# Altium PCB STM32F407_board.PcbDoc (part 3 of 3)
Units mm, origin at the board's own origin, x right, y up, seen from the top; angles counter-clockwise.
Board outline 72.6 x 74.6 mm, 4 copper layers (Top Layer, GND, PWR, Bottom Layer), stack 1.564 mm thick; 188 components, 143 nets, 738 pads, 406 vias.
Unrouted connection lines stored in the file: 4.
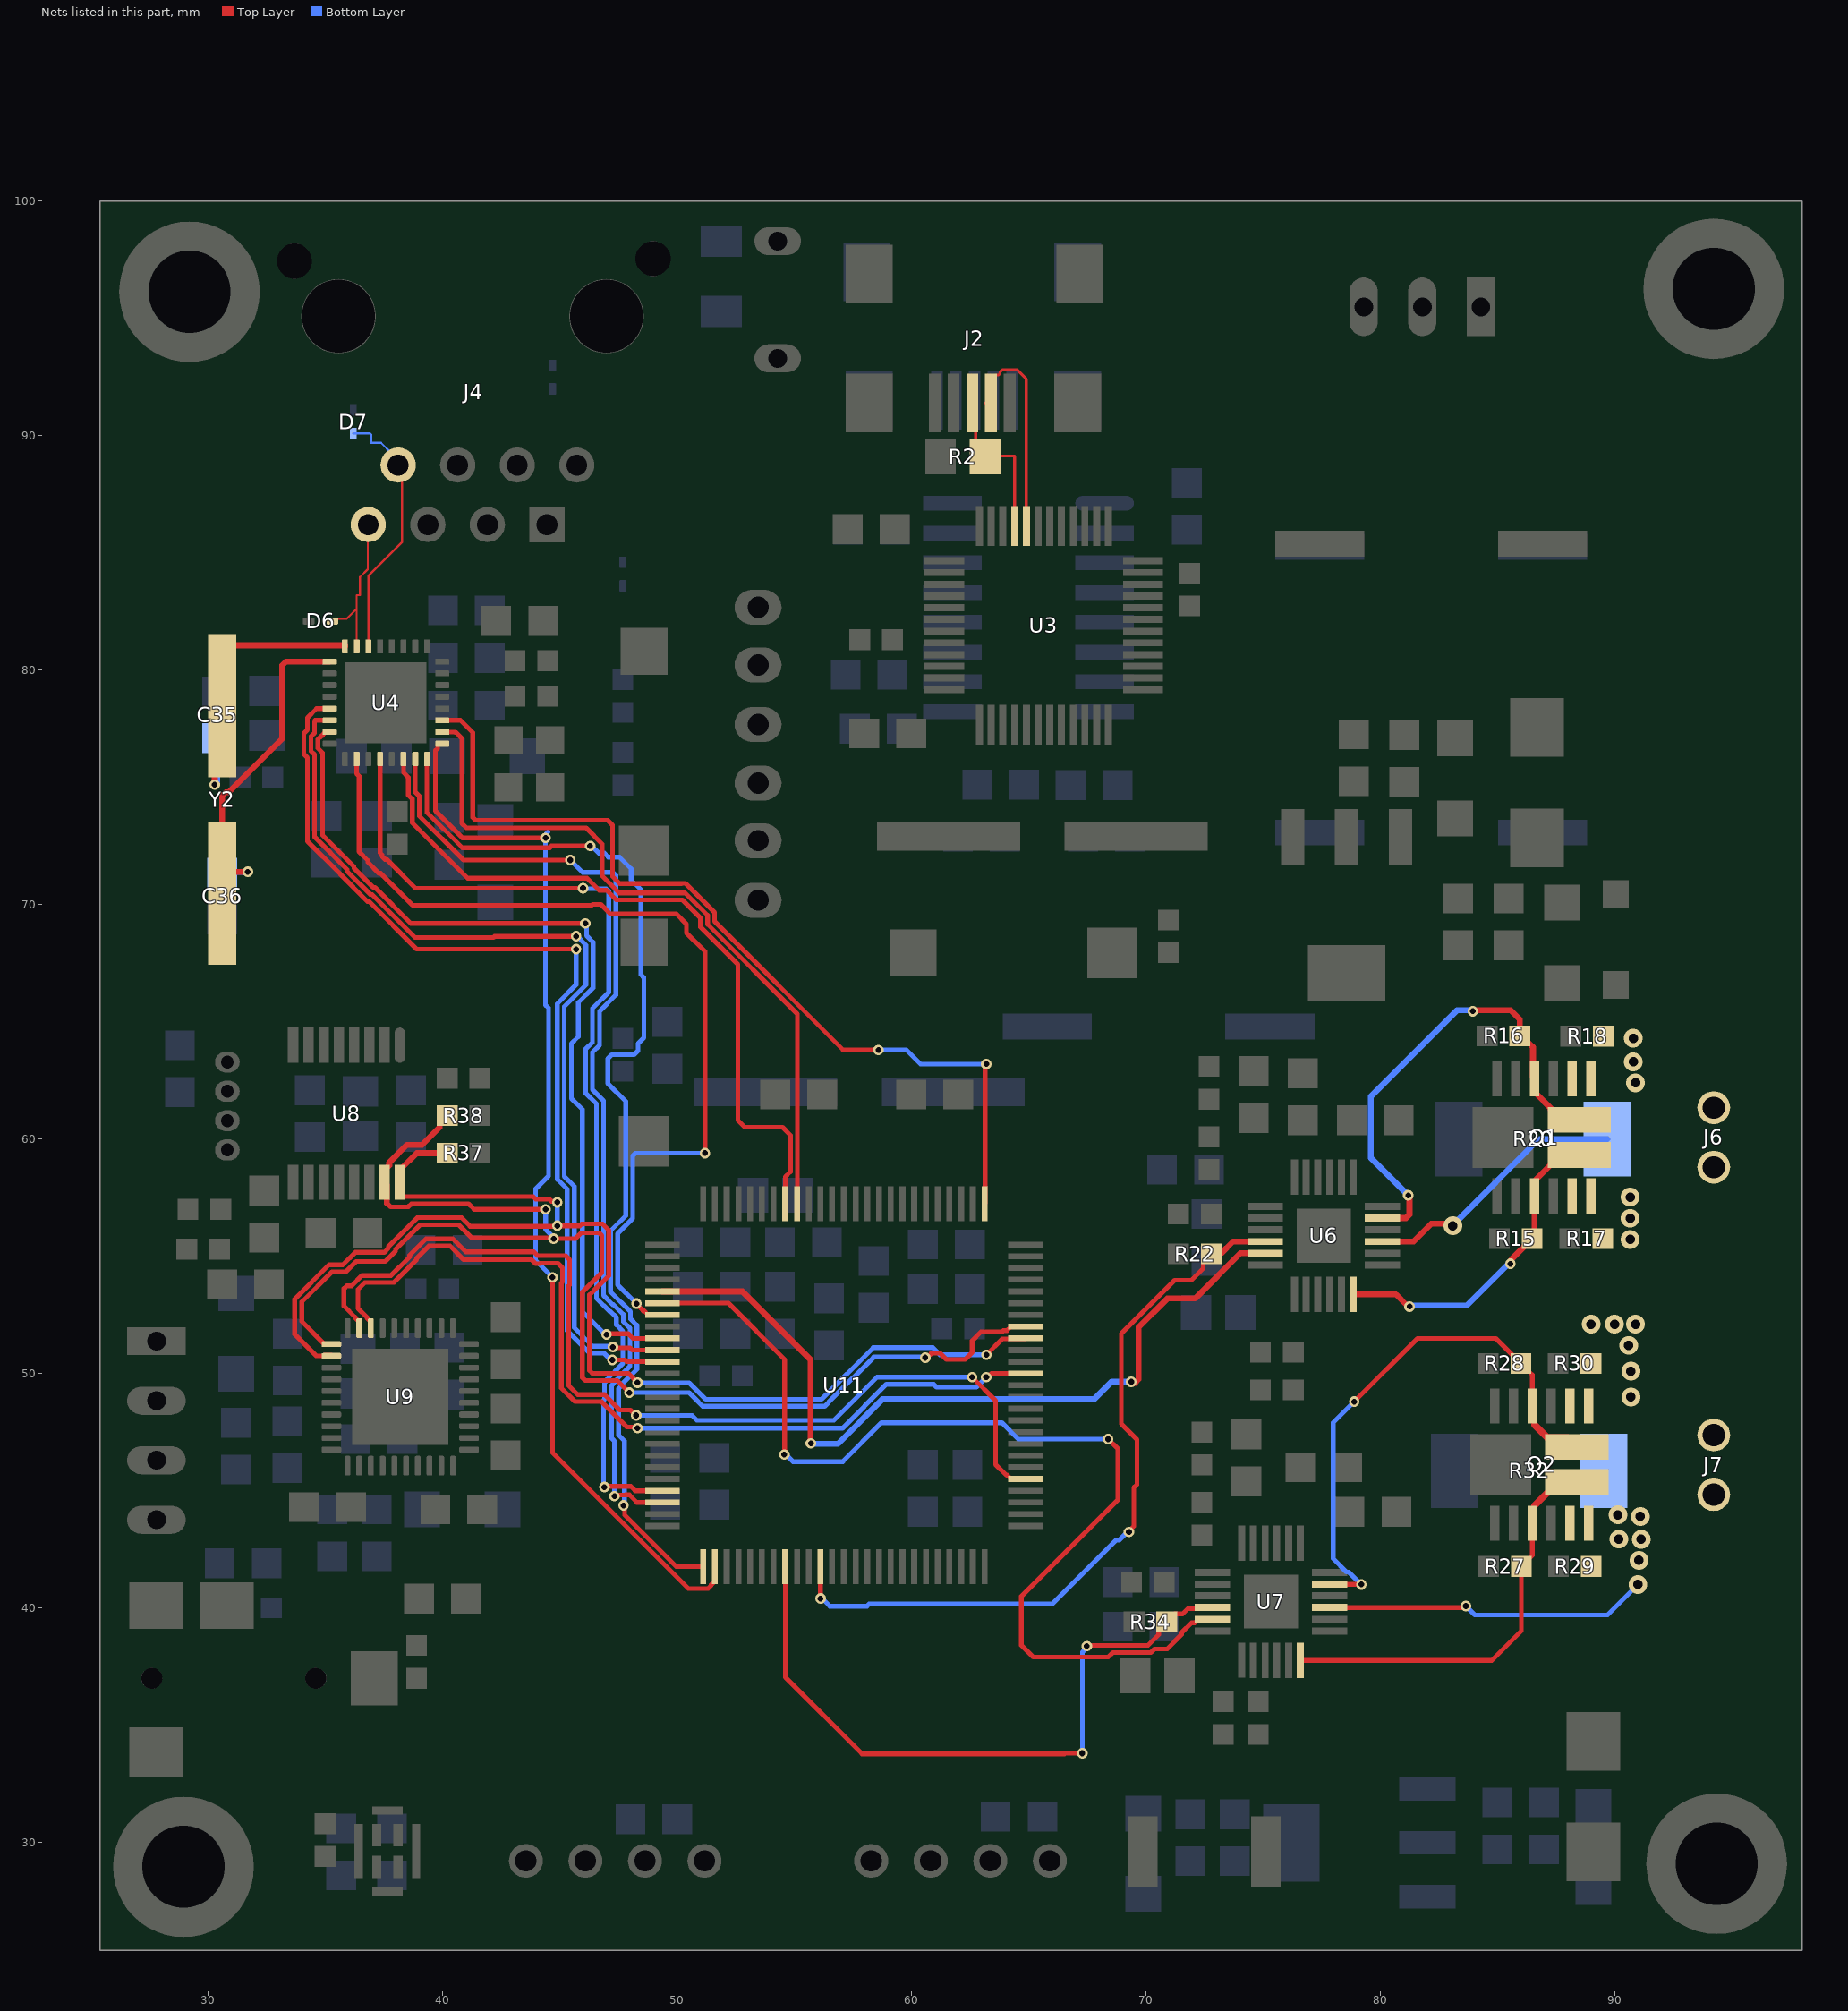
[diagram p5: the nets of this part, all layers, seen from the top]

## Via types
v1: diameter 0.8, hole 0.4, Top Layer to Bottom Layer, 257 vias
v2: diameter 0.45, hole 0.25, Top Layer to Bottom Layer, 149 vias

## Nets (pads, with @x,y where several pads share a name; then routed paths per layer and width w, separated by ;. In a path a pad name is that pad's centre, name@x,y a point inside that pad or via, vN(x,y) a via of type N, cw(c..) or ccw(c..) an arc to the next point about the centre after c; other vN are vias at no path point) (continued)
RX_D1: U4.15 U11.34 | length 38.8
  Top Layer w0.2: U4.15@35.192,77.363 35.167,77.338 34.992,77.338 34.848,77.194 34.833,77.194 34.692,77.053 34.692,76.673 34.892,76.473 34.892,72.962 36.23,71.623 36.23,71.553 37.05,70.733 37.121,70.733 38.654,69.2 v2(46.1,69.2) ; v2(47.003,51.662) 47.04,51.7 47.925,51.7 48.125,51.5 U11.34@49.389,51.5
  Bottom Layer w0.2: v2(46.1,69.2) 46.148,69.152 46.148,68.677 46.425,68.4 46.425,66.447 45.802,65.823 45.802,64.373 45.502,64.073 45.502,61.731 45.975,61.257 45.975,52.633 46.946,51.662 v2(47.003,51.662)
RX_D2: U4.14 U11.35 | length 40.3
  Top Layer w0.2: 34.542,77.8 34.542,77.327 34.392,77.177 34.392,76.549 34.542,76.399 34.542,72.887 35.93,71.499 35.93,71.429 36.926,70.433 36.997,70.433 38.829,68.6 42.182,68.6 42.232,68.65 v2(45.7,68.65) ; 34.563,77.863 U4.14@35.192,77.863 ; v2(47.275,51.128) 47.314,51.089 48.007,51.089 48.096,51 U11.35@49.389,51
  Bottom Layer w0.2: v2(45.7,68.65) 45.751,68.65 46.125,68.276 46.125,66.571 45.202,65.648 45.202,58.409 45.625,57.985 45.625,51.949 46.411,51.163 47.241,51.163 v2(47.275,51.128)
RX_D3: U4.13 U11.36 | length 41.3
  Top Layer w0.2: U4.13@35.192,78.363 34.634,78.363 34.242,77.971 34.242,77.451 34.092,77.301 34.092,76.425 34.242,76.275 34.242,72.707 35.63,71.318 35.63,71.304 36.802,70.133 36.872,70.133 38.905,68.1 v2(45.7,68.1) ; v2(47.246,50.579) 47.792,50.579 47.871,50.5 U11.36@49.389,50.5
  Bottom Layer w0.2: v2(45.7,68.1) 45.7,66.57 44.902,65.772 44.902,58.285 45.325,57.861 45.325,51.825 46.287,50.863 46.895,50.863 47.178,50.579 v2(47.246,50.579)
RX_DV: U4.18 U11.32 | length 40.8
  Top Layer w0.2: U4.18@36.342,76.213 36.342,75.591 36.442,75.491 36.442,72.26 36.83,71.872 36.83,71.801 37.299,71.333 37.369,71.333 38.727,69.975 46.374,69.975 46.408,70.01 46.761,70.01 47.17,69.6 49.983,69.6 50.413,69.17 50.413,68.79 51.2,68.003 v2(51.2,59.4) ; v2(48.281,52.981) 48.281,52.96 48.569,52.673 48.605,52.673 48.778,52.5 U11.32@49.389,52.5
  Bottom Layer w0.2: v2(48.281,52.981) 47.475,53.788 47.475,55.962 48.12,56.607 48.12,59.283 48.238,59.4 v2(51.2,59.4)
RX_ER: U4.20 U11.47 | length 43.9
  Top Layer w0.2: U4.20@37.342,76.213 37.342,72.209 37.43,72.121 37.43,72.05 37.547,71.933 37.618,71.933 38.851,70.7 v2(46,70.7) ; v2(46.913,45.157) 46.944,45.188 48.037,45.188 48.225,45 U11.47@49.389,45
  Bottom Layer w0.2: v2(46,70.7) 46.025,70.675 46.983,70.675 47.1,70.558 47.1,66.273 46.402,65.575 46.402,64.124 46.102,63.824 46.102,61.979 46.575,61.506 46.575,53.201 47.138,52.637 47.176,52.637 47.425,52.388 47.425,52.08 47.7,51.805 47.7,50.432 47,49.732 47,49.694 46.915,49.608 46.915,48.895 46.875,48.855 46.875,45.195 v2(46.913,45.157)
SCL: R37.1 U8.16 U9.2 U11.92 | length 56.8
  Top Layer w0.2: U9.2@34.974,50.75 34.617,50.75 33.7,51.667 33.7,53.173 35.164,54.636 35.752,54.636 36.281,55.165 37.518,55.165 37.7,55.347 37.7,55.414 38.93,56.644 39.076,56.644 40.817,56.644 41.183,56.278 44.878,56.278 v2(44.9,56.3) 45.86,56.3 45.937,56.378 46.83,56.378 47.1,56.107 47.1,54.177 46.575,53.652 46.275,53.352 46.275,50.13 46.405,50 47.935,50 v2(48.326,49.609) ; U8.16@38.186,58.155 38.186,57.669 38.311,57.544 43.872,57.544 43.988,57.428 44.577,57.428 44.658,57.348 44.852,57.348 v2(44.9,57.3) ; v2(63.209,50.8) 63.882,51.473 64.838,51.473 U11.92@64.865,51.5
  Top Layer w0.254: U9.2@34.974,50.75 U9.2@35.265,50.75 ; U8.16@38.186,58.155 38.186,58.68 38.906,59.4 R37.1@40.202,59.4 R37.1@40.402,59.4
  Bottom Layer w0.2: v2(44.9,56.3) v2(44.9,57.3) ; v2(48.326,49.609) 50.521,49.609 51.23,48.9 56.177,48.9 58.377,51.1 60.926,51.1 61.226,50.8 v2(63.209,50.8)
SCLK: U9.38 U11.89 | length 38.6
  Top Layer w0.2: U9.38@36.95,51.935 36.95,52.23 36.925,52.255 36.892,52.255 36.775,52.372 36.775,52.403 36.4,52.778 36.4,53.587 36.693,53.88 37.93,53.88 38.9,54.85 38.9,54.917 39.427,55.444 39.573,55.444 ; 39.574,55.445 40.32,55.445 40.906,54.858 43.805,54.858 43.98,54.683 44.146,54.683 44.163,54.7 44.934,54.7 45.125,54.509 45.125,53.899 45.075,53.849 45.075,49.376 45.651,48.8 46.788,48.8 47.875,47.713 48.276,47.713 v2(48.324,47.665) ; v2(63.198,49.841) 63.265,49.841 63.424,50 U11.89@64.865,50
  Bottom Layer w0.2: v2(48.324,47.665) 57.065,47.665 58.942,49.542 60.952,49.542 61.077,49.417 62.774,49.417 v2(63.198,49.841)
SDA: R38.1 U8.15 U9.1 U11.93 | length 58.5
  Top Layer w0.2: U9.1@35.265,51.25 34.97,51.25 34,52.22 34,53.049 35.288,54.336 35.876,54.336 36.32,54.78 37.557,54.78 38,55.223 38,55.29 39.054,56.344 39.201,56.344 ; 37.634,57.258 37.787,57.105 38.542,57.105 38.682,57.244 41.11,57.244 41.352,57.003 v2(44.401,57.003) ; 39.201,56.344 40.692,56.344 41.249,55.788 44.704,55.788 v2(44.744,55.748) 45.672,55.748 45.923,56 46.683,56 46.8,55.883 46.8,54.302 45.975,53.477 45.975,49.817 46.092,49.7 47.457,49.7 v2(47.973,49.184) ; v2(60.6,50.675) 60.668,50.675 60.864,50.871 61.225,50.871 61.496,50.6 62.3,50.6 62.6,50.9 62.6,51.4 62.973,51.773 63.874,51.773 63.928,51.827 64.081,51.827 64.254,52 U11.93@64.865,52
  Top Layer w0.254: 37.634,57.258 37.634,58.057 U8.15@37.536,58.155 37.536,58.68 37.734,58.878 37.734,58.999 38.489,59.754 39.135,59.754 39.884,60.503 39.884,60.682 R38.1@40.202,61
  Bottom Layer w0.2: v2(44.401,57.003) 44.401,56.148 44.744,55.805 v2(44.744,55.748) ; v2(47.973,49.184) 50.522,49.184 50.75,48.956 51.105,48.6 56.301,48.6 56.657,48.956 58.401,50.7 60.575,50.7 v2(60.6,50.675)
SDIN: U9.39 U11.80 | length 42.5
  Top Layer w0.2: U9.39@36.45,51.935 36.45,52.23 36.425,52.255 36.392,52.255 36.275,52.372 36.275,52.403 35.8,52.878 35.8,53.619 35.917,53.736 36.125,53.736 36.569,54.18 37.806,54.18 38.6,54.974 38.6,55.041 39.303,55.744 39.449,55.744 ; 39.45,55.745 40.444,55.745 41,55.188 43.899,55.188 44.064,55.023 45.258,55.023 45.425,54.856 45.425,53.775 45.375,53.725 45.375,49.501 45.776,49.1 46.912,49.1 47.569,48.443 48.026,48.443 48.257,48.212 v2(48.268,48.212) ; v2(62.595,49.842) 63.6,48.837 63.6,46.118 64.045,45.673 64.081,45.673 64.254,45.5 U11.80@64.865,45.5
  Bottom Layer w0.2: v2(48.268,48.212) 50.645,48.212 50.857,48 56.7,48 58.542,49.842 v2(62.595,49.842)
SH1: J6.1 Q1.3 Q1.13 R15.1 U6.18 | length 14
  Top Layer w0.254: U6.18@78.847,53.376 80.676,53.376 81.152,52.9 v2@81.3,52.9 ; v2@85.602,54.728 85.602,54.868 86.595,55.861 Q1.3@86.595,57.571 86.668,57.644 86.668,58.294 87.695,59.321 Q1.13@88.495,59.321
  Bottom Layer w0.254: v2@81.3,52.9 83.7,52.9 85.528,54.728 v2@85.602,54.728
  other v2: 81.258,52.853 85.56,54.681
SH1_2: J7.1 Q2.3 Q2.13 R27.1 U7.18 | length 17.7
  Top Layer w0.2: U7.18@76.598,37.763 84.763,37.763 86.023,39.023 R27.1@86.023,41.771 86.492,42.24 Q2.3@86.492,43.613 86.592,43.713 Q2.3@86.592,44.363 ; Q2.13@87.592,45.363 Q2.13@88.392,45.363
  Top Layer w0.3: Q2.3@86.592,44.363 Q2.13@87.592,45.363
SH2: J6.2 Q1.10 Q1.14 R16.1 U6.23 | length 20.8
  Top Layer w0.254: U6.23@80.097,56.63 81.107,56.63 81.256,56.779 81.256,57.491 81.2,57.547 v2(81.2,57.6) ; v2@84,65.5 85.561,65.5 85.962,65.099 R16.1@85.962,64.4 ; R16.1@86.064,64.378 86.064,64.298 86.28,64.083 86.359,64.083 86.522,63.92 86.522,62.644 Q1.10@86.595,62.571 86.668,62.498 86.668,61.932 87.272,61.328 87.272,61.244 87.695,60.821 Q1.14@88.495,60.821
  Bottom Layer w0.254: v2(81.2,57.6) 79.6,59.2 79.6,61.8 83.3,65.5 v2@84,65.5
  other v2: 83.958,65.453
SH2_2: J7.2 Q2.10 Q2.14 R28.1 U7.23 | length 23.8
  Top Layer w0.2: U7.23@77.848,41.017 77.856,41.009 79.191,41.009 v2(79.2,41) ; v2(78.9,48.8) 81.6,51.5 84.933,51.5 R28.1@86.006,50.427 86.492,49.941 Q2.10@86.492,48.613 86.592,48.513 86.592,47.808
  Top Layer w0.3: 86.592,47.808 87.137,47.263 87.992,47.263 Q2.14@88.392,46.863
  Bottom Layer w0.2: v2(78.9,48.8) 78,47.9 78,42.099 78.563,41.536 78.664,41.536 v2(79.2,41)
SNSOUT: R22.1 U6.10 U11.61 | length 32.3
  Top Layer w0.2: U11.61@56.127,41.762 56.13,41.759 56.13,40.407 v2(56.133,40.404) ; v2(69.286,43.243) 69.286,43.272 69.5,43.485 69.5,45.138 69.627,45.265 69.627,47.182 68.961,47.847 68.961,51.699 71.235,53.973 71.947,53.973 72.454,54.48 72.454,54.755 R22.1@72.798,55.1
  Top Layer w0.254: R22.1@73.215,55.118 73.727,55.63 U6.10@75.097,55.63
  Bottom Layer w0.2: v2(56.133,40.404) 56.201,40.404 56.529,40.075 58.113,40.075 58.211,40.173 66.024,40.173 68.751,42.9 68.887,42.9 69.23,43.243 v2(69.286,43.243)
SNSOUT_2: R34.1 U7.10 U11.58 | length 29.6
  Top Layer w0.2: U11.58@54.627,41.762 54.627,37.049 57.901,33.775 66.542,33.775 66.567,33.8 v2(67.3,33.8) ; v2(67.491,38.371) 67.519,38.4 70.097,38.4 70.554,38.856 70.554,39.055 R34.1@70.898,39.4 71.243,39.745 71.575,39.745 71.798,39.967 72.798,39.967 U7.10@72.848,40.017
  Bottom Layer w0.2: v2(67.3,33.8) 67.3,38.113 67.491,38.304 v2(67.491,38.371)
SO: U6.11 U11.30 | length 35.2
  Top Layer w0.254: U11.30@49.389,53.5 52.8,53.5 55.7,50.6 55.7,47.039 v2(55.72,47.02) ; v2@69.4,49.6 69.551,49.6 69.7,49.749 69.7,51.975 70.925,53.2 72.108,53.2 74.038,55.13 U6.11@75.097,55.13
  Bottom Layer w0.254: v2(55.72,47.02) 55.739,47 56.874,47 58.774,48.9 67.8,48.9 68.543,49.643 v2(69.386,49.643)
SO_2: U7.11 U11.31 | length 44.9
  Top Layer w0.2: U11.31@49.389,53 52.2,53 54.6,50.6 54.6,46.557 v2(54.586,46.543) ; v2(68.4,47.2) 68.805,46.795 68.805,44.606 64.7,40.501 64.7,38.4 65.2,37.9 68.4,37.9 68.6,38.1 70.222,38.1 70.372,38.25 70.92,38.25 71.543,38.873 71.543,38.95 71.96,39.367 72.098,39.367 72.248,39.517 U7.11@72.848,39.517
  Bottom Layer w0.2: v2@54.6,46.5 54.697,46.5 54.957,46.241 57.078,46.241 58.738,47.9 63.862,47.9 64.562,47.2 v2(68.4,47.2)
SP: Q1.5 Q1.6 Q1.7 Q1.8 R17.1 R18.1 R20.2 U6.21 | length 11.5
  Top Layer w0.254: U6.21@80.097,55.63 81.431,55.63 82.192,56.391 83.009,56.391 v1(83.1,56.3)
  Bottom Layer w0.254: v1(83.1,56.3) 83.1,56.325 86.775,60 R20.2@89.7,60
  other v1: 90.674,55.72 90.674,56.62 90.674,57.52 90.9,62.4 90.8,63.3 90.8,64.3
SP_2: Q2.5 Q2.6 Q2.7 Q2.8 R29.1 R30.1 R32.2 U7.21 | length 13.9
  Top Layer w0.2: U7.21@77.848,40.017 v2@83.683,40.017
  Bottom Layer w0.2: v2(83.66,40.08) 84.04,39.7 89.7,39.7 v1(91,41)
  other v1: 91.039,42.029 90.181,42.934 91.139,42.929 91.1,43.9 90.142,43.967 90.7,49 90.7,50.1 90.6,51.2 89,52.1 90,52.1 90.9,52.1
TD_N: D7.K J4.2 U4.6 | length 10.6
  Top Layer w0.092: U4.6@36.842,81.013 36.842,84.024 38.275,85.457 38.275,88.381 J4.2@38.157,88.499
  Bottom Layer w0.092: D7.K@36.2,90.095 36.911,90.095 36.957,90.049 36.957,89.7 37.38,89.7 37.83,89.25 J4.2@38.11,89.25
TD_P: D6.K J4.1 U4.7 | length 6.8
  Top Layer w0.092: D6.K@35.3,82 35.5,82.2 35.922,82.2 36.342,82.62 ; U4.7@36.342,81.013 36.342,82.62 ; J4.1@36.817,86.21 36.817,84.309 36.482,83.974 36.482,83.2 36.342,83.2 36.342,82.62
TX_CLK: U4.22 U11.18 | length 31.7
  Top Layer w0.2: U4.22@38.342,76.213 38.342,75.634 38.542,75.434 38.542,74.679 38.719,74.502 38.719,73.481 41.075,71.125 46.176,71.125 46.692,70.61 47.009,70.61 47.419,70.2 50.231,70.2 51.013,69.418 51.013,69.038 52.6,67.451 52.6,60.8 52.9,60.5 54.51,60.5 54.847,60.163 54.847,58.605 54.627,58.385 U11.18@54.627,57.238
TX_D0: U4.24 U11.51 | length 46.8
  Top Layer w0.2: U4.24@39.342,76.213 39.342,73.934 40.853,72.423 44.574,72.423 44.65,72.499 v2(46.299,72.499) ; v2(47.727,44.374) 47.775,44.326 47.775,43.967 49.98,41.762 U11.51@51.127,41.762
  Bottom Layer w0.2: v2(46.299,72.499) 46.367,72.499 46.667,72.2 46.907,72.2 47.08,72.027 47.554,72.027 48.054,71.527 48.054,71.053 48.473,70.634 48.473,67.013 48.6,66.886 48.6,64.326 48.345,64.071 48.345,63.771 48.173,63.6 47.227,63.6 47.056,63.429 47.056,62.374 47.82,61.609 47.82,56.732 47.175,56.086 47.175,53.487 48.025,52.637 48.025,52.329 48.3,52.054 48.3,50.183 47.701,49.584 47.701,49.546 47.515,49.36 47.515,47.367 47.763,47.119 47.763,44.41 v2(47.727,44.374)
TX_D1: U4.25 U11.52 | length 45.5
  Top Layer w0.1: U4.25@39.992,76.863 U4.25@40.035,76.82
  Top Layer w0.2: U4.25@39.992,76.863 39.817,76.863 39.792,76.838 39.792,76.663 39.7,76.571 39.7,74 40.852,72.848 v2(44.398,72.848) ; v2(44.7,54.1) 44.7,46.617 50.493,40.824 51.337,40.824 51.459,40.946 51.459,40.983 51.627,41.151 U11.52@51.627,41.762
  Bottom Layer w0.2: 44.5,73.1 44.446,73.046 44.446,72.896 v2(44.398,72.848) 44.398,65.718 44.525,65.591 44.525,58.425 43.976,57.876 43.976,54.824 v2(44.7,54.1)
TX_D2: U4.26 U11.17 | length 31.1
  Top Layer w0.2: U4.26@39.992,77.363 40.517,77.363 40.542,77.338 40.589,77.338 40.83,77.097 40.83,73.47 41.027,73.273 46.127,73.273 46.823,72.577 46.823,71.22 47.543,70.5 50.356,70.5 51.313,69.543 51.313,69.163 55.147,65.329 55.147,57.578 U11.17@55.1,57.531
TX_D3: U4.27 U11.1 | length 39
  Top Layer w0.2: U4.27@39.992,77.863 40.764,77.863 41.299,77.328 41.299,73.717 41.416,73.6 47.055,73.6 47.262,73.393 47.262,71.205 47.567,70.9 50.2,70.9 50.207,70.907 50.373,70.907 51.613,69.667 51.613,69.287 57.1,63.8 v2(58.6,63.8) ; U11.1@63.127,57.238 63.154,57.265 63.154,63.154 v2(63.2,63.2) v2@63.152,63.248
  Bottom Layer w0.2: v2(58.6,63.8) 59.8,63.8 60.4,63.2 v2(63.2,63.2)
TX_EN: U4.23 U11.48 | length 42.1
  Top Layer w0.2: U4.23@38.842,76.213 38.842,74.803 39.019,74.626 39.019,73.781 40.9,71.9 v2(45.455,71.9) ; v2(47.338,44.763) 47.386,44.811 47.796,44.811 47.81,44.825 47.976,44.825 48.301,44.5 U11.48@49.389,44.5
  Bottom Layer w0.2: v2(45.455,71.9) 45.982,71.373 47.283,71.373 47.4,71.256 47.4,66.149 46.702,65.451 46.702,64 46.402,63.7 46.402,62.103 46.875,61.63 46.875,53.325 47.263,52.937 47.3,52.937 47.725,52.513 47.725,52.204 48,51.929 48,50.308 47.401,49.709 47.401,49.67 47.215,49.484 47.215,47.243 47.338,47.12 v2(47.338,44.763)
USB_D_N: J2.2 U3.32 | length 11.8
  Top Layer w0.125: J2.2@63.165,91.396 63.179,91.396 J2.2@63.366,91.583 ; J2.2@63.366,92.583 63.366,92.183 J2.2@63.366,91.583 ; U3.32@64.909,86.153 64.909,92.421 64.517,92.813 63.883,92.813 63.787,92.717 63.787,92.661 63.714,92.587 63.587,92.587 63.357,92.357 63.357,90.819 63.357,91.574 J2.2@63.366,91.583
USB_D_P: J2.3 R2.1 U3.33 | length 7.9
  Top Layer w0.125: J2.3@62.566,92.583 62.566,91.183 62.753,90.996 62.753,89.647 63.261,89.139 64.409,89.139 U3.33@64.409,86.153
XTAL_IN_25MHZ: C36.2 U4.9 Y2.2 | length 15.3
  Top Layer w0.254: Y2.2@30.607,70.486 Y2.2@30.607,70.927 ; v2(31.7,71.4) 31.08,71.4 Y2.2@30.607,70.927 ; U4.9@35.192,80.363 33.321,80.363 33.165,80.207 33.165,77.075 30.884,74.794 30.756,74.794 30.607,74.645 Y2.2@30.607,70.927
  Bottom Layer w0.254: C36.2@30.607,71.358 30.649,71.4 v2(31.7,71.4)
XTAL_OUT_25MHZ: C35.2 U4.8 Y2.1 | length 13.1
  Top Layer w0.254: v2(30.287,75.113) 30.287,78.166 Y2.1@30.607,78.486 30.607,80.588 31.08,81.061 35.84,81.061 35.842,81.059 U4.8@35.842,81.013
  Bottom Layer w0.254: v2(30.287,75.113) 30.287,75.166 30.4,75.279 C35.2@30.4,77.1
pads on no net: J2.1 J2.4 J4. J4.3 J4.4 J4.7 J4.8 J5.1 J5.4 J9. J9.4 J12. MH3.1 MH4.1 U3.2 U3.3 U3.4 U3.10 U3.11 U3.12 U3.13 U3.14 U3.15 U3.16 U3.17 U3.19 U3.21 U3.22 U3.28 U3.29 U3.30 U3.31 U3.41 U3.42 U3.43 U3.45 U3.46 U4.30 U4.31 U5.7 U5.8 U5.9 U5.10 U5.11 U5.12 U5.13 U5.15 U8.6 U8.7 U8.8 U8.9 U9.20 U9.21 U9.22 U9.23 U9.24 U9.25 U9.26 U9.29 U9.30 U9.35 U9.36 U11.2 U11.3 U11.4 U11.5 U11.7 U11.8 U11.9 U11.15 U11.38 U11.39 U11.40 U11.41 U11.42 U11.43 U11.44 U11.46 U11.67 U11.77 U11.81 U11.82 U11.83 U11.84 U11.85 U11.86 U11.87 U11.88 U11.91 U11.95 U11.96 U11.97 U11.98

## Polygon pours and split planes (outlines as drawn)
+1V8 on Bottom Layer "+1V8_L04_P069" (solid, remove dead copper, pour order 69): 35.435,52.4 35.435,50.37 41.164,50.37 41.164,52.1 38.603,52.1 38.5,52.1 38.444,53.096 38.281,53.4 37.223,53.4 37.223,52.868 36.756,52.4
NetC25_2 on Bottom Layer "NETC25_2_L04_P122" (solid, remove dead copper, pour order 122): 51,96 51,94.5 51.1,94.6 53.6,94.6 53.6,95.8 53.4,96
EARTH_GND on Bottom Layer "EARTH_GND_L04_P119" (solid, remove dead copper, pour order 119): 25.751,92.3 33.1,92.3 33.1,96.8 56,96.8 56.9,95.9 74.5,95.9 76,97.4 87.8,97.4 90.3,94.9 90.3,92.7 90.5,92.5 97.5,92.5 97.5,99.4 97.4,99.5 26.1,99.5 25.849,99.249
NetC27_2 on Bottom Layer "NETC27_2_L04_P006" (solid, pour order 6): 40.9,83.824 39.157,83.824 39.157,82.102 40.9,82.102
+3V3 on Bottom Layer "+3V3_L04_P008" (solid, remove dead copper, pour order 8): 42.982,74.411 42.971,74.4 38.309,74.4 38.059,74.651 37.211,74.651 37.211,74.85 36.747,75.314 36.747,77.023 35.547,77.023 35.512,77.058 35.255,76.801 35.255,75.663 35.192,75.6 35.192,74.974 31.4,74.4 31.4,72.474 33.625,72.474 34.042,72.891 41.241,72.891 41.241,72.735 41.621,72.735 43.059,72.661
GND on Bottom Layer "GND_L04_P009" (solid, remove dead copper, pour order 9): 41.306,84.2 41.306,76.694 42.694,75.306 44.64,75.306 44.64,77.46 44.1,78 44.1,84.2
GND on Bottom Layer "GND_L04_P010" (solid, remove dead copper, pour order 10): 43.177,72.325 41.902,72.498 34.165,72.498 32.367,71.107 31.471,70.095 31.471,68.494 43.177,68.494 43.283,68.6 43.273,68.61
NetC77_1 on Bottom Layer "NETC77_1_L04_P104" (solid, remove dead copper, pour order 104): 55.5,61.1 57.4,61.1 57.4,62.8 55.5,62.8
NetC76_1 on Bottom Layer "NETC76_1_L04_P105" (solid, remove dead copper, pour order 105): 58.4,61.05 60.6,61.05 60.6,62.75 58.4,62.75
NetC86_2 on Bottom Layer "NETC86_2_L04_P099" (solid, remove dead copper, pour order 99): 52.4,58.4 53.4,58.4 53.4,56.4 55.3,56.4 55.3,52.9 51.7,52.9 51.6,53 51.6,56.3 51.7,56.4 52.4,56.4
GND on Bottom Layer "GND_L04_P058" (solid, remove dead copper, pour order 58): 33.471,63.1 35.352,63.1 35.539,62.913 35.539,61.439 33.574,61.439 33.471,61.543
GND on Bottom Layer "GND_L04_P054" (solid, remove dead copper, pour order 54): 80.2,61.706 83.556,61.706 83.556,58.46 83.551,58.464 80.836,58.464 80.2,59.1
GND on Bottom Layer "GND_L04_P115" (solid, remove dead copper, pour order 115): 49.8,51 49.9,50.9 52,50.9 52.2,50.7 52.2,49.2 53.4,49.2 53.6,49.4 53.6,50.9 55.4,50.9 55.4,50.7 55.7,50.4 57.3,50.4 57.4,50.5 57.4,52 59.2,52 59.4,51.8 60.2,51.8 60.7,51.3 61.9,51.3 61.9,52.5 61.8,52.5 61.6,52.7 61.6,54.2 61.8,54.4 63,54.4 63.2,54.6 63.4,54.6 63.4,56 63.1,56.3 61.8,56.3 61.5,56.3 61.5,54.9 61.1,54.5 59.5,54.5 59.5,54.1 59.1,53.7 57.7,53.7 57.5,53.5 57.5,52.5 57.3,52.3 55.6,52.3 55.3,52.6 49.8,52.6
GND on Bottom Layer "GND_L04_P113" (solid, remove dead copper, pour order 113): 48.8,47.4 48.8,45.7 52.7,45.7 53.1,46.1 53.1,47.4
GND on Bottom Layer "GND_L04_P112" (solid, remove dead copper, pour order 112): 63.1,45.4 58.8,45.4 58.808,45.408 58.808,47.07 63.07,47.07 63.1,47.1
+1V8 on Bottom Layer "+1V8_L04_P094" (solid, remove dead copper, pour order 94): 83.2,30.6 78.6,30.6 77.5,31.7 74.9,31.7 74.8,31.6 74.8,30.1 71.2,30.1 71.2,30.3 68.8,30.3 68.8,26.2 73,26.2 73,28.1 78.7,28.1 78.8,28 79.3,28.5 83.2,28.5
GND on Bottom Layer "GND_L04_P110" (solid, remove dead copper, pour order 110): 34.6,29.7 38.6,29.7 38.6,26.9 34.6,26.9
+3V3 on Bottom Layer "+3V3_L04_P108" (solid, remove dead copper, pour order 108): 34.4,32.4 34.4,29.9 38.5,29.9 38.5,32.4
GND on Bottom Layer "GND_L04_P096" (solid, remove dead copper, pour order 96): 89.8,30.8 83.6,30.8 83.3,31.1 83.3,31.7 80.6,31.7 80.6,33.4 86.8,33.4 87.5,32.7 89.8,32.7 89.8,32.6
NetC13_2 on Bottom Layer "NETC13_2_L04_P091" (solid, remove dead copper, pour order 91): 90,30.4 83.9,30.4 83.9,28.7 83.4,28.2 80.8,28.2 80.8,27.2 80.9,27.1 83.8,27.1 83.9,27 89.8,27 90,27.2
GND on Bottom Layer "GND_L04_P078" (solid, remove dead copper, pour order 78): 83.4,47.4 83.5,47.3 83.5,44.1 82,44.1 81.5,43.6 81.5,43.4 80.3,43.4 80.2,43.3 80.2,47.4 83.5,47.4
GND on Bottom Layer "GND_L04_P081" (solid, remove dead copper, pour order 81): 67.7,65.8 67.7,63.8 62.6,63.8 62.5,63.9 62.5,65.7 62.6,65.8
+12V on Bottom Layer "+12V_L04_P077" (solid, remove dead copper, pour order 77): 73.4,64.2 77.5,64.2 77.7,64 77.7,62.8 79.2,62.8 79.2,65.4 73.4,65.4 73.4,65
SP_2 on Bottom Layer "SP_2_L04_P072" (solid, remove dead copper, pour order 72): 87.8,49.613 88.062,49.613 88.293,49.613 88.293,52.8 89.4,52.8 91.6,52.8 91.6,41.2 91.6,40.2 88.5,40.2 88.5,42.024 87.899,42.625
+3V3 on Bottom Layer "+3V3_L04_P068" (solid, remove dead copper, pour order 68): 38.353,55.871 39.734,55.871 39.734,54.451 39.778,54.407 39.631,54.26 39.324,54.26 39.324,53.146 39.27,53.2 38.571,53.2 38.353,53.599
GND on Bottom Layer "GND_L04_P067" (solid, remove dead copper, pour order 67): 37.837,49.837 41.164,49.837 41.164,48.279 41.135,48.25 41.2,48.185 41.2,46.34 37.592,46.34 37.589,46.336 37.536,46.389 37.536,49.85
GND on Bottom Layer "GND_L04_P066" (solid, pour order 66): 33.6,42.9 34.448,42.9 38.064,42.9 38.064,41.336 33.6,41.336
GND on Bottom Layer "GND_L04_P064" (solid, remove dead copper, pour order 64): 41.836,47.205 41.841,47.2 43.3,47.2 43.4,47.1 43.4,43.279 43.221,43.1 40.9,43.1 40.9,44.994 40.97,45.064 41.757,45.064 41.836,45.143
+3V3 on Bottom Layer "+3V3_L04_P062" (solid, remove dead copper, pour order 62): 34.259,50.4 32.7,50.4 32.7,50.5 32.4,50.8 29.5,50.8 29.5,46.794 32.521,46.794 32.521,48.75 34.248,48.75 34.248,50.389
NetC56_2 on Bottom Layer "NETC56_2_L04_P061" (solid, remove dead copper, pour order 61): 37.37,50.036 37.37,48.142 37.328,48.1 37.328,46.526 37.328,46.318 37.37,46.177 37.37,45.1 38.234,45.1 38.234,43.506 38.164,43.436 34.767,43.436 34.607,43.596 34.607,44.876 34.83,45.1 35.47,45.1 35.47,50.036
+3V3 on Bottom Layer "+3V3_L04_P060" (solid, remove dead copper, pour order 60): 36,57.3 36.5,57.3 36.5,59 36.919,59.419 37.47,59.419 37.8,59.419 37.8,61.3 39.3,61.3 39.3,62.7 37.704,62.7 37.4,62.396 37.4,61 36,61
SP on Bottom Layer "SP_L04_P050" (solid, remove dead copper, pour order 50): 88.828,65.1 88.81,65.082 88.81,55.11 91.382,55.11 91.3,55.193 91.3,65.1
GND on Bottom Layer "GND_L04_P039" (solid, remove dead copper, pour order 39): 79.4,73.6 75.2,73.6 75.2,69.076 77.176,69.076 77.2,69.1 77.2,72.3 79.2,72.3 79.4,72.5
+12V on Bottom Layer "+12V_L04_P037" (solid, remove dead copper, pour order 37): 85,74.166 89.4,74.166 89.4,71.366 85.1,71.366 85,71.466
GND on Bottom Layer "GND_L04_P034" (solid, remove dead copper, pour order 34): 75.433,84.6 79.433,84.6 79.433,87.86 75.533,87.86 75.433,87.76
+12V on Bottom Layer "+12V_L04_P032" (solid, remove dead copper, pour order 32): 89.1,84.7 89.2,84.8 89.2,88.1 84.6,88.1 84.5,88 84.5,84.7
GND on Bottom Layer "GND_L04_P030" (solid, remove dead copper, pour order 30): 57,98.3 60.2,98.3 60.2,95.75 60.1,95.65 57,95.65
GND on Bottom Layer "GND_L04_P027" (solid, remove dead copper, pour order 27): 57,81.96 58.259,81.96 58.259,80.841 58.3,80.8 58.2,80.7 58.2,79.206 58.8,78.606 58.8,74.9 57,74.9
GND on Bottom Layer "GND_L04_P025" (solid, remove dead copper, pour order 25): 66.101,92.8 69.099,92.8 69.099,90.148 66.153,90.148 66.101,90.2
GND on Bottom Layer "GND_L04_P022" (solid, pour order 22): 68.15,98.2 68.15,95.6 68.05,95.6 67.95,95.6 65.05,95.6 65.05,98.2 65.45,98.2
GND on Bottom Layer "GND_L04_P021" (solid, pour order 21): 59.2,92.9 56,92.9 56,90.2 59.2,90.2
GND on Bottom Layer "GND_L04_P019" (solid, remove dead copper, pour order 19): 58.003,86.697 57.966,86.661 55.939,86.661 55.9,86.7 55.7,86.7 55.7,85.3 55.852,85.148 58.003,85.148
+3V3 on Bottom Layer "+3V3_L04_P017" (solid, remove dead copper, pour order 17): 62.8,87.7 58.6,87.7 58.6,85.166 58.619,85.148 60.248,85.148 60.4,85.3 63.1,85.3 63.05,85.35 63.05,87.45
+3V3 on Bottom Layer "+3V3_L04_P011" (solid, pour order 11): 64.036,74.36 67.459,74.36 67.459,75.886 67.459,79.6 64.036,79.6
+12V on Top Layer "+12V_L01_P083" (solid, remove dead copper, pour order 83): 78.7,62.8 85.5,62.8 85.5,63.4 86,63.4 86.116,63.284 86.116,61.697 86.403,61.697 86.7,61.4 86.7,58.7 86.3,58.7 86.104,58.504 86.104,56.571 85.654,56.571 85.5,56.725 85.5,58.3 85.2,58.6 83.9,58.6 83.8,58.5 78.7,58.5
NetC25_2 on Top Layer "NETC25_2_L01_P121" (solid, remove dead copper, pour order 121): 33.1,98.5 33.1,96.3 49.4,96.3 50.3,95.4 50.3,94.6 50.7,94.2 52.6,94.2 52.6,93.4 53.5,92.5 55.6,92.5 55.6,96 55.3,96.3 51.3,96.3 49.2,98.4 34.9,98.4 34.3,98.9 34.2,98.9 33.1,98.9
+12V on Top Layer "+12V_L01_P125" (solid, remove dead copper, pour order 125): 83.7,96.7 83.7,91.9 88,91.9 88.1,91.8 88.8,91.8 88.8,95 87.1,96.7
GND on Top Layer "GND_L01_P120" (solid, remove dead copper, pour order 120): 41.3,84.2 44.1,84.2 44.1,82.9 42.9,82.9 42.9,81.5 41.3,81.5
NetC27_2 on Top Layer "NETC27_2_L01_P001" (solid, remove dead copper, pour order 1): 38.183,80.645 38.184,80.646 38.537,80.646 38.537,81.737 39.157,82.102 40.9,82.102 40.9,82.6 40.9,83.845 39.157,83.845 38.149,82.249 38.149,80.674 38.152,80.671
+12V on Top Layer "+12V_L01_P084" (solid, remove dead copper, pour order 84): 77.6,48.1 79.2,48.1 79.4,48.3 83,48.3 83.8,47.5 85.2,47.5 85.303,47.603 85.303,49.569 85.94,49.569 85.984,49.613 85.984,47.516 86.384,47.516 86.5,47.4 86.5,44.8 86.1,44.8 86,44.7 86,42.8 85.4,42.8 85.4,44.5 85.2,44.7 84.4,44.7 82.8,43.1 77.6,43.1
GND on Top Layer "GND_L01_P057" (solid, remove dead copper, pour order 57): 36.5,64.8 36.5,63.2 35.827,63.2 35.539,62.913 35.539,61.439 35.039,61.439 35,61.4 35,62.9 35.3,63.2 35.3,64.8
+12V on Top Layer "+12V_L01_P045" (solid, remove dead copper, pour order 45): 85.5,63.4 85.5,61.726 85.274,61.5 84,61.5 83.8,61.3 83.8,58.7 83.9,58.6 85.2,58.6 85.5,58.3 85.5,56.725 85.654,56.571 86.104,56.571 86.104,58.504 86.3,58.7 86.7,58.7 86.7,61.4 86.403,61.697 86.116,61.697 86.116,63.284 86,63.4
GND on Top Layer "GND_L01_P111" (solid, remove dead copper, pour order 111): 34.6,26.9 38.6,26.9 38.6,29.7 35.6,29.7 35.6,28.8 34.6,28.8
+3V3 on Top Layer "+3V3_L01_P109" (solid, remove dead copper, pour order 109): 34.4,32.4 34.4,29.9 38.5,29.9 38.5,32.4
NetC76_1 on Top Layer "NETC76_1_L01_P107" (solid, remove dead copper, pour order 107): 58.462,61.034 60.662,61.034 60.662,62.734 58.462,62.734
NetC77_1 on Top Layer "NETC77_1_L01_P106" (solid, remove dead copper, pour order 106): 55.5,61.1 57.5,61.1 57.5,62.8 55.5,62.8
NetC86_2 on Top Layer "NETC86_2_L01_P097" (solid, remove dead copper, pour order 97): 52.4,54.9 53.4,54.9 53.4,58.4 52.4,58.4
+1V8 on Top Layer "+1V8_L01_P095" (solid, remove dead copper, pour order 95): 71.2,31.2 71.2,27.9 71.5,27.6 72.8,27.6 72.8,26.2 68.8,26.2 68.8,31.2
NetC13_2 on Top Layer "NETC13_2_L01_P087" (solid, remove dead copper, pour order 87): 83.8,26.953 90.5,26.953 90.5,30.7 90.4,30.8 90.3,30.7 83.8,30.7
+12V on Top Layer "+12V_L01_P085" (solid, remove dead copper, pour order 85): 94.45,36.8 94.45,33 87.55,33 87.55,36.8 87.45,36.8 88.45,36.8
+12V on Top Layer "+12V_L01_P076" (solid, remove dead copper, pour order 76): 76.4,41.9 76.8,41.9 76.8,42.6 77.3,43.1 79.43,43.1 79.43,46.83 79.464,46.864 77.889,46.864 77.889,45.162 76.4,43.673
GND on Top Layer "GND_L01_P080" (solid, remove dead copper, pour order 80): 83.442,47.388 83.542,47.288 83.542,44.088 82.042,44.088 81.542,43.588 81.542,43.388 80.342,43.388 80.242,43.288 80.242,47.388 83.542,47.388
GND on Top Layer "GND_L01_P053" (solid, remove dead copper, pour order 53): 80.2,61.706 83.556,61.706 83.556,58.46 83.551,58.464 80.836,58.464 80.2,59.1
+12V on Top Layer "+12V_L01_P075" (solid, remove dead copper, pour order 75): 85.4,42.8 86,42.8 86,44.7 86.1,44.8 86.5,44.8 86.5,47.4 86.4,47.5 86,47.5 85.984,47.516 85.984,49.613 85.347,49.613 85.303,49.569 85.303,47.603 85.2,47.5 83.8,47.5 83.8,44.8 83.9,44.7 85.2,44.7 85.4,44.5
SP_2 on Top Layer "SP_2_L01_P074" (solid, remove dead copper, pour order 74): 87.9,44.4 91.6,44.4 91.6,42.449 91.6,40.3 91.5,40.2 88.5,40.2 88.5,42.024 87.899,42.625 87.899,44.399
SP_2 on Top Layer "SP_2_L01_P073" (solid, remove dead copper, pour order 73): 87.8,47.727 91.656,47.727 91.694,47.765 91.6,47.859 91.6,52.8 88.293,52.8 88.293,49.613 87.807,49.613 87.8,49.606
SH1_2 on Top Layer "SH1_2_L01_P071" (solid, remove dead copper, pour order 71): 95.6,43.8 95.6,46 86.9,46 86.9,44.8 91.611,44.8 92.611,43.8
SH2_2 on Top Layer "SH2_2_L01_P070" (solid, remove dead copper, pour order 70): 95.6,48.5 95.6,46.3 86.9,46.3 86.9,47.5 91.611,47.5 92.611,48.5
GND on Top Layer "GND_L01_P065" (solid, remove dead copper, pour order 65): 41.836,47.205 41.841,47.2 43.3,47.2 43.4,47.1 43.4,43.279 43.221,43.1 40.9,43.1 40.9,44.994 40.97,45.064 41.757,45.064 41.836,45.143
+3V3 on Top Layer "+3V3_L01_P038" (solid, remove dead copper, pour order 38): 77.8,74.3 79.2,74.3 79.2,70.1 80.009,69.291 86.609,69.291 87,68.9 87,67.9 87.1,67.8 90.809,67.8 90.8,67.791 90.8,66 86.99,66 86.931,65.941 86.4,66.473 86.4,67.4 82.619,67.4 82.3,67.4 82.077,67.4 80.5,67.4 80.5,66.2 80.1,65.8 76.6,65.8 76.6,68.754 76.616,68.771 77.689,68.771
+3V3 on Top Layer "+3V3_L01_P059" (solid, remove dead copper, pour order 59): 35.994,57.302 36.494,57.302 36.494,59.002 36.913,59.421 37.8,59.421 37.8,60.812 37.994,61.302 39.294,61.302 39.294,62.702 37.699,62.702 37.394,62.398 37.394,61.002 35.994,61.002
SH2 on Top Layer "SH2_L01_P043" (solid, remove dead copper, pour order 43): 95.4,60.4 95.4,62.4 93.3,62.4 92.4,61.5 87.1,61.5 87.1,60.2 95.2,60.2
+12V on Top Layer "+12V_L01_P051" (solid, remove dead copper, pour order 51): 77.998,60.202 78.65,59.55 78.65,57.5 79.385,57.5 79.7,57.814 79.7,60.106 79.7,61.9 79.2,61.9 79.2,65.4 75.836,65.4 75.836,61.9 77.194,61.9 77.364,61.729
SP on Top Layer "SP_L01_P049" (solid, remove dead copper, pour order 49): 87.9,58.4 91.4,58.4 91.4,55.093 88.807,55.093 88.8,55.1 88.81,55.11 88.81,56.571 87.869,56.571
SP on Top Layer "SP_L01_P048" (solid, remove dead copper, pour order 48): 88.828,65.1 91.4,65.1 91.4,63.5 91.4,62.2 91.5,62.1 91.28,61.88 87.86,61.88 87.86,63.526 87.905,63.571 88.828,63.571
SH1 on Top Layer "SH1_L01_P041" (solid, remove dead copper, pour order 41): 87.1,59.9 87.1,58.889 87.289,58.7 92.5,58.7 93.5,57.7 95.5,57.7 95.5,59.9
+12V on Top Layer "+12V_L01_P036" (solid, remove dead copper, pour order 36): 85,74.2 89.4,74.2 89.4,71.4 85.1,71.4 85,71.5
NetC7_2 on Top Layer "NETC7_2_L01_P035" (solid, remove dead copper, pour order 35): 85.3,79 84.426,78.126 77.526,78.126 75.564,76.164 75.564,71.271 76.771,71.271 77,71.5 77,76.2 87.9,76.2 87.8,76.3 87.8,79
GND on Top Layer "GND_L01_P033" (solid, remove dead copper, pour order 33): 75.433,84.6 79.433,84.6 79.433,87.86 75.533,87.86 75.433,87.76
+12V on Top Layer "+12V_L01_P031" (solid, remove dead copper, pour order 31): 89.1,84.7 89.2,84.8 89.2,88.1 84.6,88.1 84.5,88 84.5,84.7
GND on Top Layer "GND_L01_P029" (solid, remove dead copper, pour order 29): 57,98.3 60.2,98.3 60.2,95.7 57,95.7
GND on Top Layer "GND_L01_P028" (solid, remove dead copper, pour order 28): 57,81.96 58.259,81.96 58.259,80.841 58.3,80.8 58.2,80.7 58.2,79.206 58.8,78.606 58.8,74.9 57,74.9
GND on Top Layer "GND_L01_P024" (solid, remove dead copper, pour order 24): 66.101,92.8 69.099,92.8 69.101,92.797 69.101,90.148 66.153,90.148 66.101,90.2
GND on Top Layer "GND_L01_P023" (solid, remove dead copper, pour order 23): 65.1,98.2 68.2,98.2 68.2,95.6 68,95.6 65.1,95.6
GND on Top Layer "GND_L01_P020" (solid, pour order 20): 59.2,92.85 56,92.85 56,90.15 59.2,90.15
GND on Top Layer "GND_L01_P018" (solid, pour order 18): 58,86.7 57.961,86.661 55.939,86.661 55.9,86.7 55.7,86.7 55.7,85.3 55.852,85.148 58.003,85.148 58.003,86.697
+3V3 on Top Layer "+3V3_L01_P016" (solid, remove dead copper, pour order 16): 63.1,85.3 63.1,87.4 62.8,87.7 58.6,87.7 58.6,85.166 58.581,85.148 60.148,85.148 60.5,85.3
+3V3 on Top Layer "+3V3_L01_P012" (solid, pour order 12): 67.1,76.8 67.1,79 66.5,79.6 64.036,79.6 64.036,78.796 64.068,78.765 66.714,78.765 66.714,78.514 66.7,78.5 66.7,76.8
+1V8 on PWR (split plane): 42.84,51.377 42.882,51.349 42.931,51.339 43.471,51.339 43.471,38.829 40,38.829 39.95,38.82 39.908,38.792 39.88,38.75 39.871,38.7 39.871,32.529 34.2,32.529 34.15,32.52 34.108,32.492 34.08,32.45 34.071,32.4 34.071,28.7 34.08,28.65 34.108,28.608 34.483,28.234 34.525,28.206 34.574,28.196 36.746,28.196 36.891,28.052 36.933,28.024 36.982,28.014 67.343,28.014 67.393,28.024 67.435,28.052 68.192,28.808 68.22,28.85 68.229,28.9 68.229,32.046 68.257,32.074 83.571,32.074 83.571,26 83.58,25.95 83.607,25.91 25.91,25.91 25.91,35.171 38.9,35.171 38.95,35.18 38.992,35.208 39.02,35.25 39.029,35.3 39.029,39.3 39.029,45.546 40.192,46.708 40.22,46.75 40.229,46.8 40.229,49.4 40.22,49.45 40.192,49.492 40.15,49.52 40.1,49.529 39.863,49.529 39.814,49.52 39.793,49.506 36.671,49.506 36.65,49.52 36.6,49.529 35.854,49.529 35.329,50.054 35.329,53.371 40.846,53.371
EARTH_GND on PWR (split plane): 97.49,92.393 97.45,92.42 97.4,92.429 90.329,92.429 90.329,94.6 90.32,94.65 90.292,94.692 87.692,97.292 87.65,97.32 87.6,97.329 83.4,97.329 83.35,97.32 83.308,97.292 82.808,96.792 82.78,96.75 82.771,96.7 82.771,94.554 82.246,94.029 80.7,94.029 79.605,94.029 79.556,94.02 79.514,93.992 79.499,93.977 77.906,93.977 77.892,93.992 76.292,95.592 76.25,95.62 76.2,95.629 68.9,95.629 68.85,95.62 68.808,95.592 68.746,95.529 57.054,95.529 55.992,96.592 55.95,96.62 55.9,96.629 51.454,96.629 51.292,96.792 51.25,96.82 51.2,96.829 41.8,96.829 41.75,96.82 41.708,96.792 41.646,96.729 33.2,96.729 33.15,96.72 33.108,96.692 33.08,96.65 33.071,96.6 33.071,92.054 32.946,91.929 25.91,91.929 25.91,99.49 97.49,99.49
+12V on PWR (split plane): 90.071,94.546 90.071,92.3 90.08,92.25 90.108,92.208 90.15,92.18 90.2,92.171 97.4,92.171 97.45,92.18 97.49,92.207 97.49,25.91 83.793,25.91 83.82,25.95 83.829,26 83.829,33.4 83.82,33.45 83.792,33.492 81.192,36.092 81.15,36.12 81.1,36.129 79.954,36.129 74.129,41.954 74.129,43.746 75.592,45.208 75.62,45.25 75.629,45.3 75.629,48.646 76.392,49.408 76.42,49.45 76.429,49.5 76.429,52.8 76.42,52.85 76.392,52.892 76.35,52.92 76.3,52.929 73.954,52.929 73.593,53.29 73.593,57.46 73.583,57.51 73.555,57.552 73.513,57.58 73.464,57.59 71.993,57.59 71.192,58.392 71.15,58.42 71.1,58.429 69.154,58.429 68.829,58.754 68.829,59.7 68.82,59.75 68.792,59.792 68.529,60.054 68.529,61.2 68.529,65.346 69.154,65.971 74.871,65.971 75.333,65.508 75.375,65.48 75.425,65.471 91.5,65.471 91.55,65.48 91.592,65.508 91.62,65.55 91.629,65.6 91.629,68.077 91.62,68.127 91.592,68.169 89.848,69.912 89.806,69.94 89.757,69.95 84.426,69.95 84.072,70.304 84.072,80.457 84.063,80.507 84.035,80.549 83.429,81.154 83.429,84 83.42,84.05 83.392,84.092 82.429,85.054 82.429,93.846 82.992,94.408 83.02,94.45 83.029,94.5 83.029,96.646 83.454,97.071 87.546,97.071
+3V3 on PWR (split plane): 240 vertices, not listed, extent 25.91,28.273 91.371,96.571
GND on GND (split plane): 97.49,25.91 25.91,25.91 25.91,32.271 40,32.271 40.05,32.28 40.092,32.308 40.12,32.35 40.129,32.4 40.129,38.571 43.6,38.571 43.65,38.58 43.692,38.608 43.72,38.65 43.729,38.7 43.729,54.1 43.72,54.15 43.692,54.192 43.65,54.22 43.6,54.229 40.2,54.229 40.15,54.22 40.108,54.192 40.08,54.15 40.071,54.1 40.08,54.05 40.108,54.008 40.15,53.98 40.2,53.971 43.471,53.971 43.471,38.829 40,38.829 39.95,38.82 39.908,38.792 39.88,38.75 39.871,38.7 39.871,32.529 25.91,32.529 25.91,56.818 25.917,56.808 25.959,56.78 26.008,56.771 33.608,56.771 33.658,56.78 33.7,56.808 33.728,56.85 33.738,56.9 33.728,56.95 33.7,56.992 33.658,57.02 33.608,57.029 26.008,57.029 25.959,57.02 25.917,56.992 25.91,56.982 25.91,65.707 25.95,65.68 26,65.671 43.471,65.671 43.471,58.159 43.468,58.156 43.458,58.106 43.458,56.929 38.339,56.929 38.289,56.92 38.247,56.892 38.219,56.85 38.209,56.8 38.219,56.75 38.247,56.708 38.289,56.68 38.339,56.671 43.588,56.671 43.637,56.68 43.68,56.708 43.708,56.75 43.717,56.8 43.717,58.065 43.72,58.069 43.729,58.118 43.729,65.8 43.72,65.85 43.692,65.892 43.65,65.92 43.6,65.929 26,65.929 25.95,65.92 25.91,65.893 25.91,99.49 97.49,99.49

## Keep-outs
Keep-Out Layer:
  the board outline again, w0.127

## Other copper
GND (plane layer: these items are gaps in the copper):
  lines w0.254: 25.9,32.4 40,32.4 40,38.7 43.6,38.7 43.6,54.1 40.2,54.1 ; 26.008,56.9 33.608,56.9 ; 38.339,56.8 38.7,56.8 39.997,56.8 41.991,56.8 43.588,56.8 43.588,58.106 43.6,58.118 43.6,65.8 42.8,65.8 ; 42.8,65.8 26,65.8 42.8,65.8
PWR (plane layer: these items are gaps in the copper):
  lines w0.254: 25.9,35.3 26.4,35.3 37.2,35.3 38.9,35.3 38.9,39.3 38.9,45.6 40.1,46.8 40.1,49.4 39.863,49.4 39.839,49.376 36.624,49.376 36.6,49.4 35.8,49.4 35.2,50 35.2,53.5 40.9,53.5 42.931,51.469 43.6,51.469 ; 25.9,91.8 33,91.8 33.2,92 33.2,96.6 41.7,96.6 41.8,96.7 51.2,96.7 51.4,96.5 55.9,96.5 57,95.4 68.8,95.4 68.9,95.5 74.9,95.5 76.2,95.5 77.8,93.9 77.853,93.847 79.553,93.847 79.605,93.9 80.7,93.9 ; 25.998,56.9 33.598,56.9 ; 26,65.8 43.6,65.8 43.6,56.8 38.7,56.8 38.339,56.8 ; 40.205,54.1 40.538,54.433 43.6,54.433 43.6,38.7 40,38.7 40,32.4 34.2,32.4 34.2,28.7 34.574,28.326 36.8,28.326 36.982,28.143 67.343,28.143 68.1,28.9 68.1,32.1 68.203,32.203 83.626,32.203 ; 75.1,39 75.1,40 ; 83.7,26 83.7,33.4 81.1,36 79.9,36 74,41.9 74,43.8 75.5,45.3 75.5,48.7 76.3,49.5 76.3,52.8 73.9,52.8 73.464,53.236 73.464,57.46 71.94,57.46 71.1,58.3 69.1,58.3 68.7,58.7 68.7,59.7 68.4,60 68.4,61.2 68.4,65.517 68.428,65.428 69.1,66.1 74.925,66.1 75.425,65.6 91.5,65.6 91.5,68.077 89.757,69.82 84.373,69.82 83.943,70.25 83.943,80.457 83.3,81.1 83.3,84 82.3,85 82.3,93.9 ; 97.4,92.3 90.2,92.3 90.2,94.6 87.6,97.2 83.4,97.2 82.9,96.7 82.9,94.5 82.3,93.9 ; 80.7,93.9 80.7,93.9 ; 80.7,93.9 82.3,93.9

## Silkscreen, mask and mechanical layers (free items; w line width, h text height)
Top Overlay:
  lines w0.254: 25.9,32.4 26.74,32.4 ; 26,65.8 43.6,65.8 43.6,41.3 43.6,38.7 40,38.7 40,32.4 39.9,32.4 26.6,32.4 ; 26.6,32.4 26.6,32.4
  text "Debugger" at 52.1,87 h0.8
  text "ADC&DAC" at 33.3,66 h0.8

## Text inside footprints (layer, text, board x,y; h text height)
D1: Top Overlay "K" at 84.7,78.575 h0.89 r90; Top Overlay "A" at 84.575,71.45 h0.89 r90
D2: Top Overlay "A" at 90.977,70.887 h0.89 r270; Top Overlay "K" at 90.91,66.574 h0.89 r270
D3: Top Overlay "K" at 91.1,28.575 h0.89 r270; Top Overlay "A" at 91.225,35.7 h0.89 r270
U5: Bottom Overlay "1" at 69.089,87.628 h0.89; Bottom Overlay "8" at 69.016,76.668 h0.89; Bottom Overlay "9" at 61.122,76.791 h0.89; Bottom Overlay "16" at 59.7,87.8 h0.89
U8: Top Overlay "1" at 37.924,65.249 h0.64 r270; Top Overlay "8" at 33.347,65.465 h0.64 r270